# Allegro board CAD3.brd
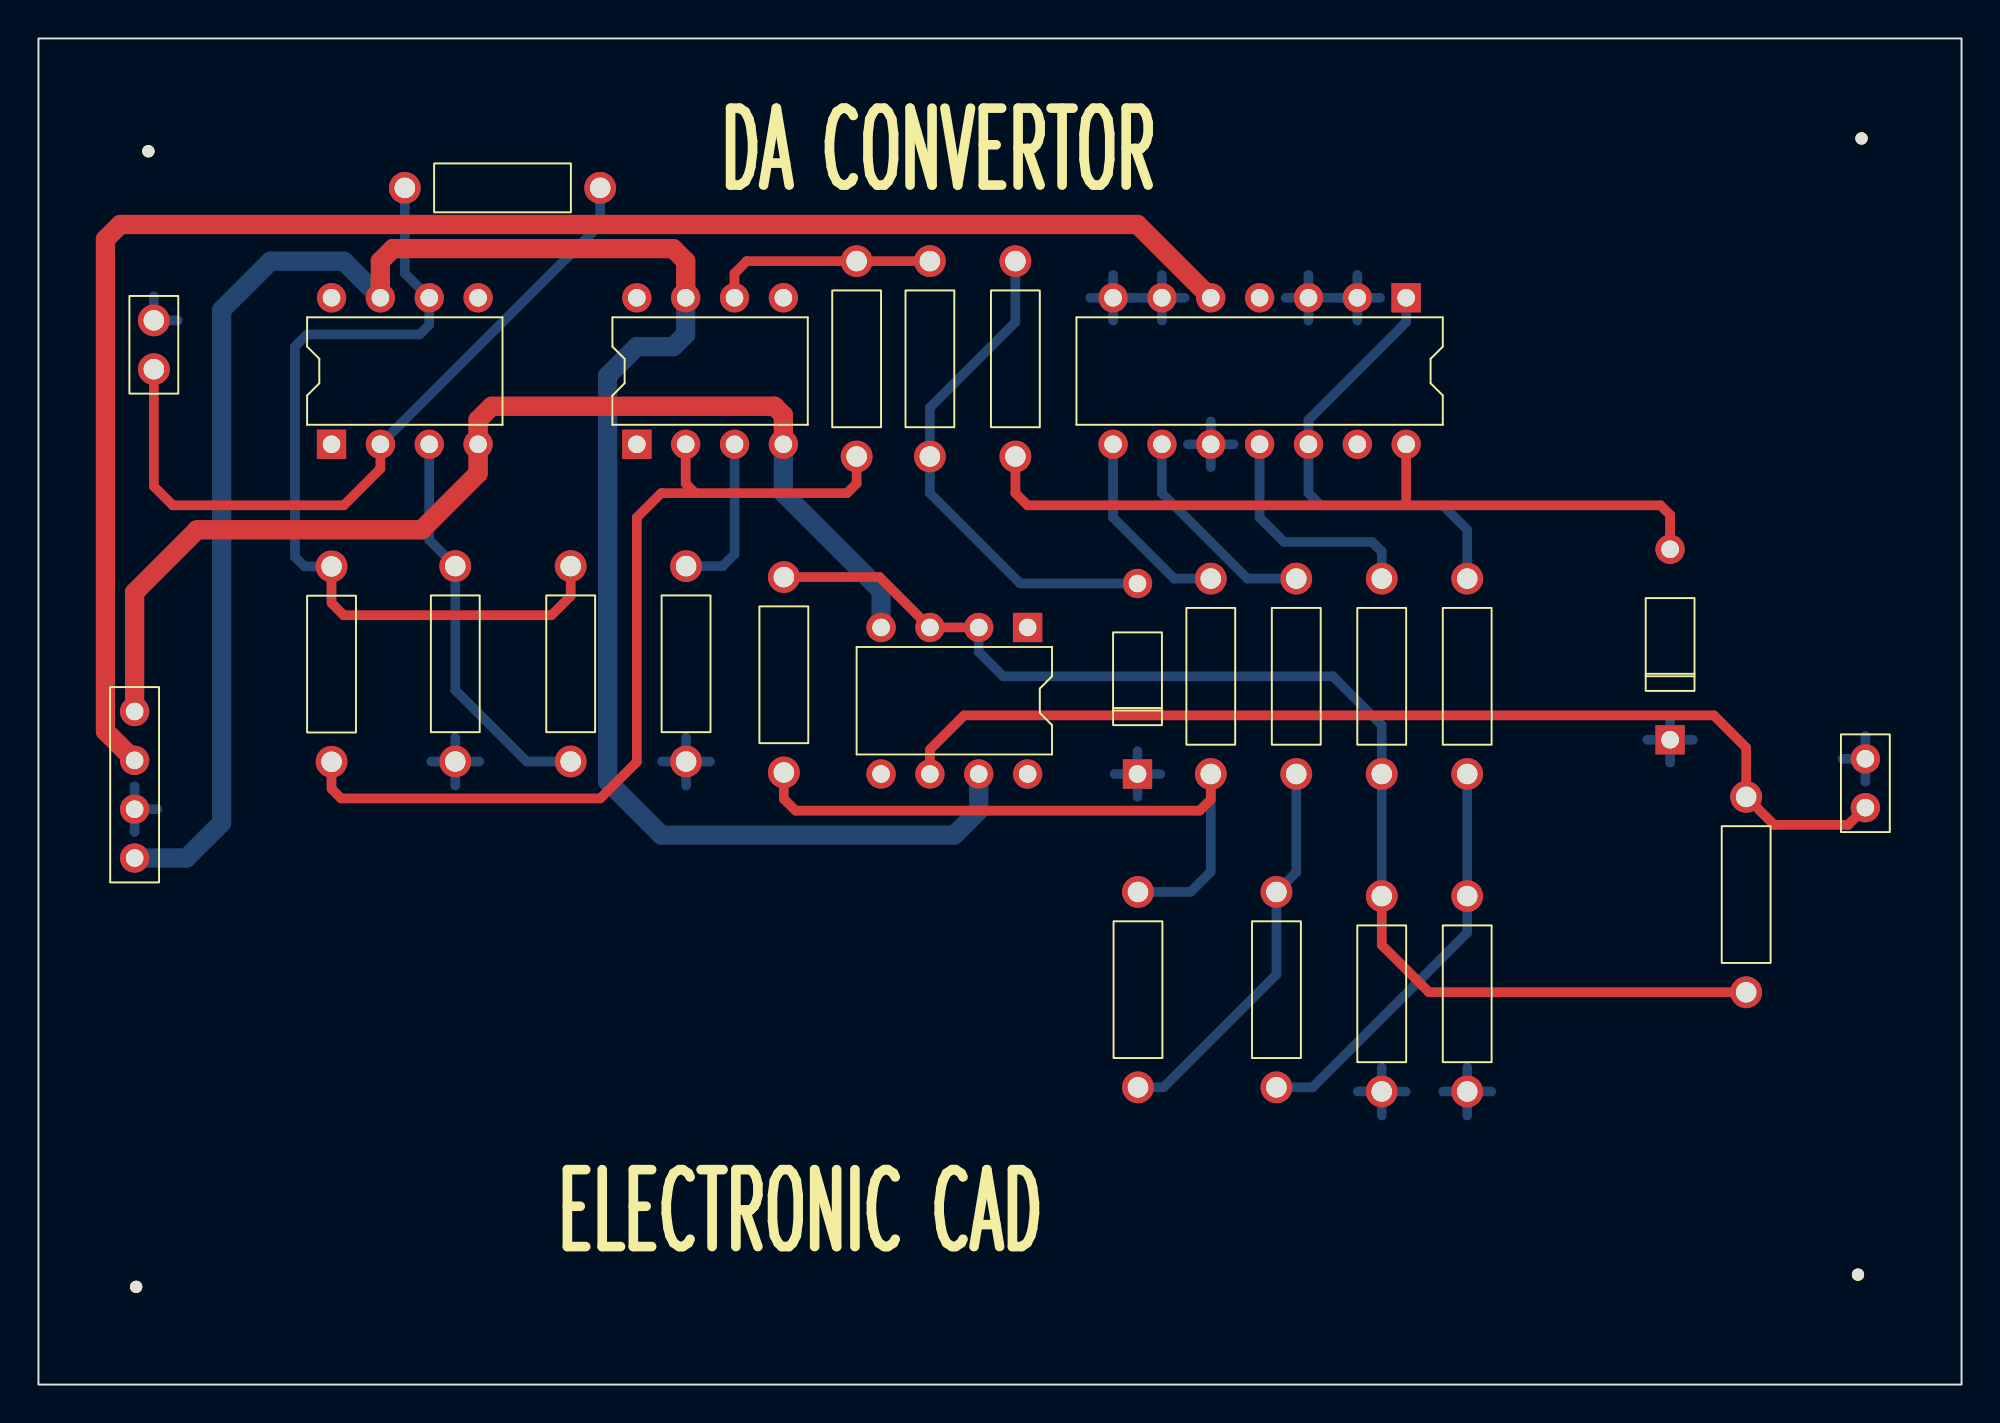
[diagram p0: board, top side]
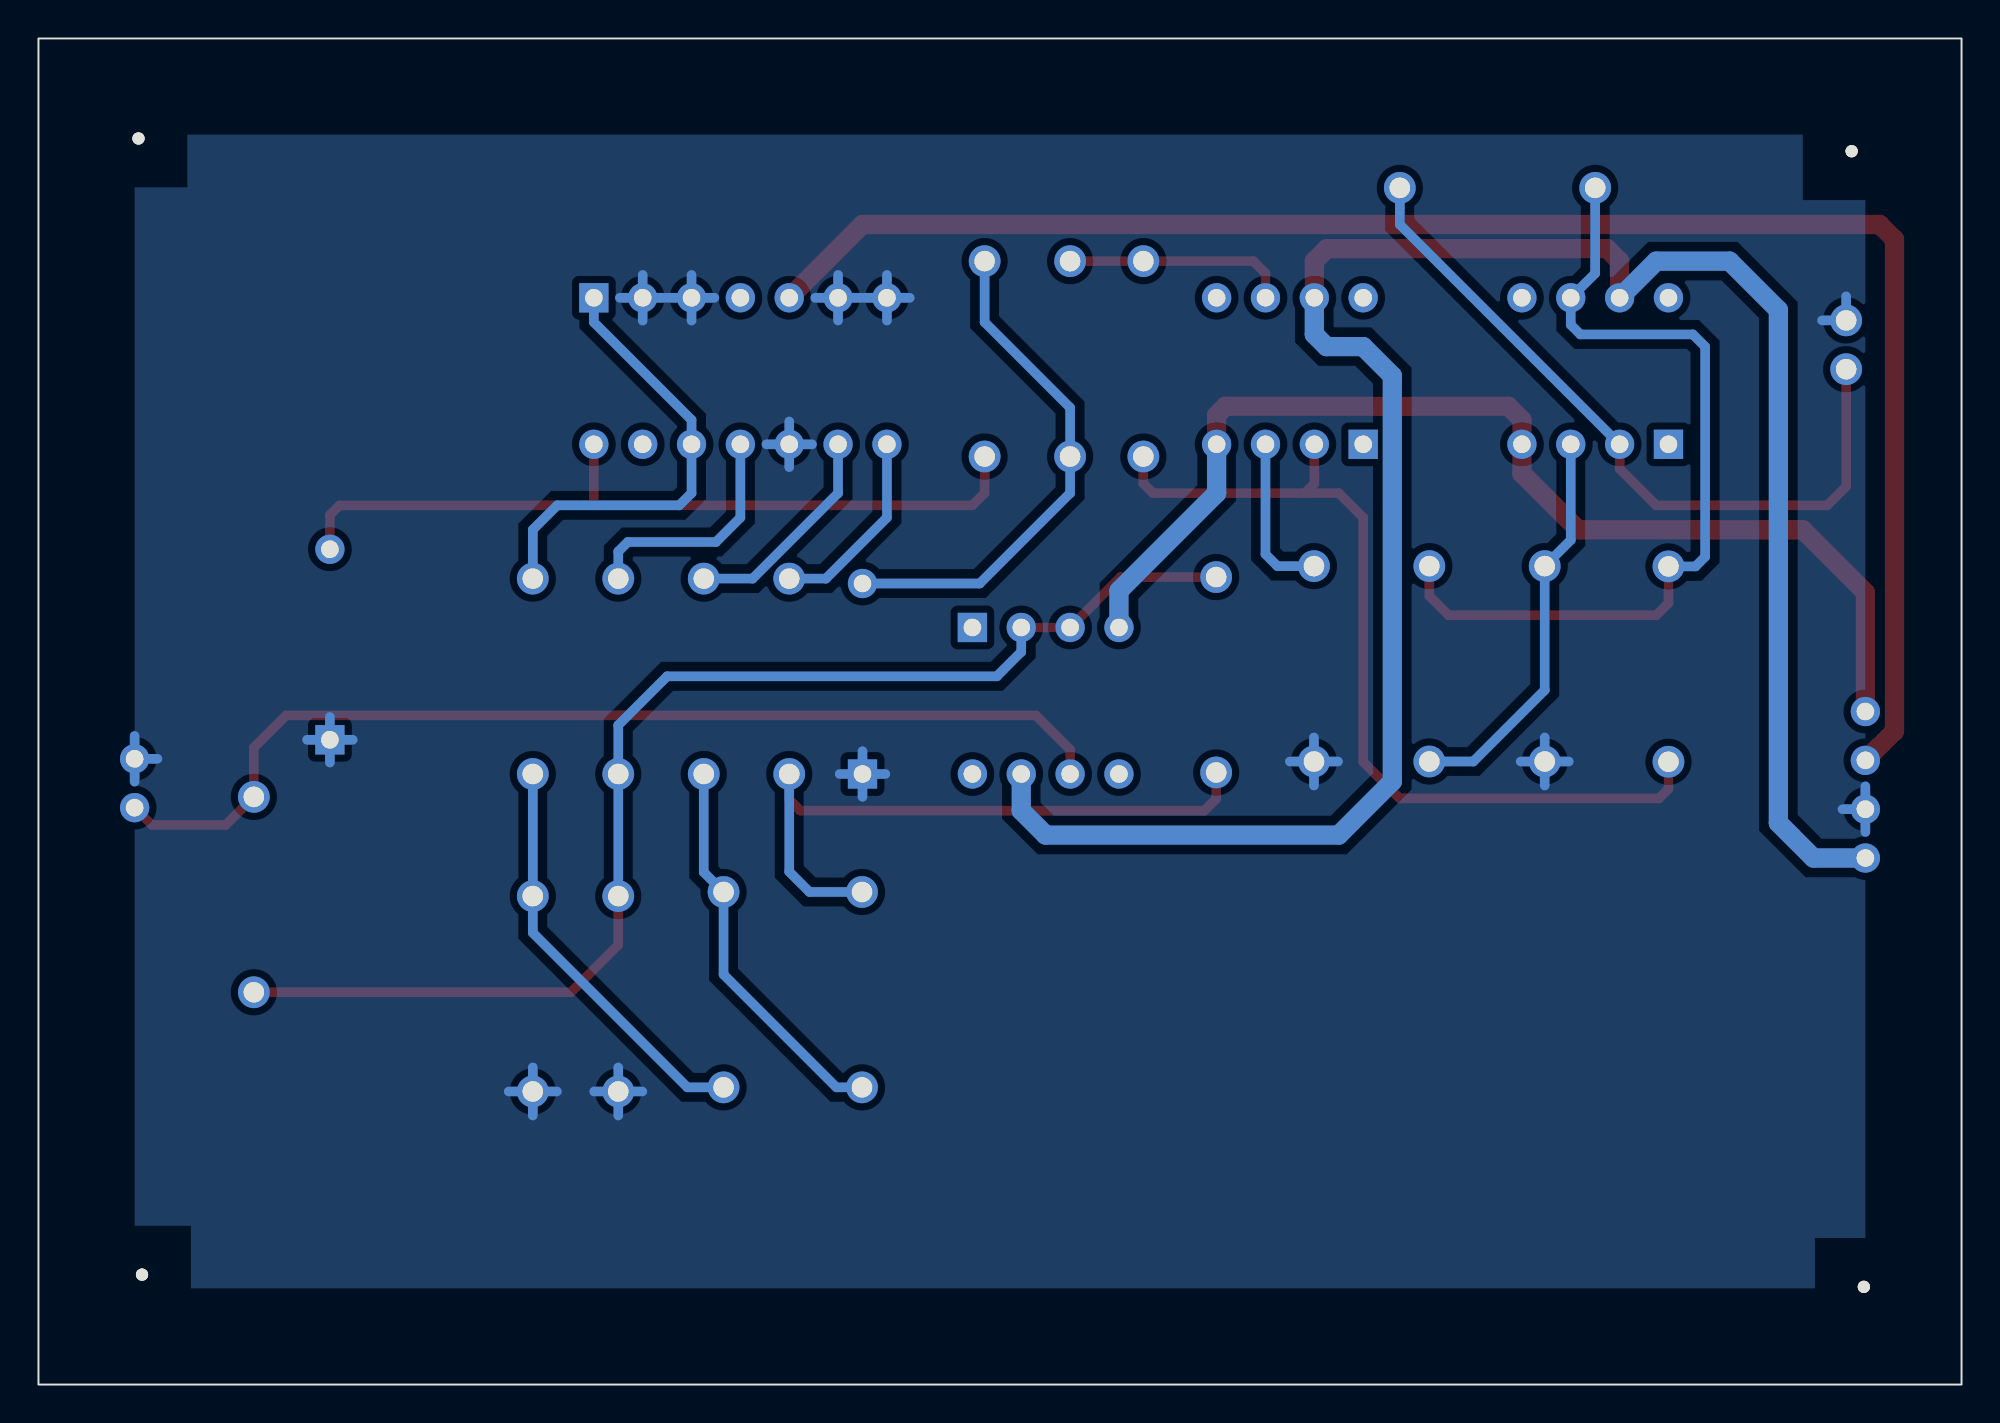
[diagram p1: board, bottom side, seen from below]

Outline 100 x 70 mm; copper layers: TOP, BOTTOM. Coordinates in mm from the lower left corner of the outline.
Outline path: rectangle 0,0 100,70

## Design rules (mm)
constraint set DEFAULT: min track width 0.5

## Placement (name value [footprint] x y rotation side)
C1  0.01uF  [CAPCK05]  6 52.8 0 top
D1  D1N4148  [DO41]  57.15 31.75 0 top
D2  RD100EB  [DO41]  84.84 33.53 0 top
J1  CON2  [JUMPER2]  95 30 90 top
J2  CON4  [JUMPER4]  5 35 270 top
NOREF  -  [unnamed]  5.08 5.08 0 top
NOREF#2  -  [#2]  0 70 0 top
NOREF#3  -  [unnamed]  94.8 64.8 0 top
NOREF#4  -  [unnamed]  5.71 64.14 0 top
NOREF#5  -  [unnamed]  94.61 5.71 0 top
NOREF#6  -  [#2]  100 0 90 top
R1  10K  [RES400]  29.21 62.23 90 top
R2  5.1K  [RES400]  42.55 48.26 0 top
R3  10K  [RES400]  15.24 42.55 180 top
R4  1K  [RES400]  46.35 58.42 180 top
R5  1K  [RES400]  50.8 58.42 180 top
R6  10K  [RES400]  33.67 32.4 0 top
R7  6.8K  [RES400]  27.68 32.4 0 top
R8  1K  [RES400]  21.68 32.4 0 top
R9  22K  [RES400]  69.85 41.91 180 top
R10  22K  [RES400]  88.8 20.4 0 top
R11  10K  [RES400]  38.76 31.83 0 top
R12  22K  [RES400]  60.96 31.75 0 top
R13  10K  [RES400]  57.17 15.46 0 top
R14  22K  [RES400]  65.41 31.75 0 top
R15  10K  [RES400]  64.38 15.46 0 top
R16  10KK  [RES400]  69.85 25.4 180 top
R17  22K  [RES400]  74.3 31.75 0 top
R18  10K  [RES400]  74.3 15.24 0 top
U1  LM741  [DIP8_3]  15.24 48.9 90 top
U2  LM741  [DIP8_3]  31.11 48.9 90 top
U3  74LS90  [DIP14_3]  71.12 56.52 270 top
U4  LM741  [DIP8_3]  51.44 39.37 270 top

## Library data of the parts
C1 = CAP NP: Tolerance: ***; User Part Number: ***
D1 = 1N4148
D2 = RD100EB
J1 = CON2: User Part Number: ***
J2 = CON4: User Part Number: ***
R1-R18 = R: Tolerance: ***; User Part Number: ***
U1 U2 U4 = LM741_1: Tolerance: ***; User Part Number: ***
U3 = 74LS90_6: Tolerance: ***; User Part Number: ***

## Footprints (pads in the part's own frame, mm; a bottom-side part is the same pattern mirrored in y, then rotated)
CAPCK05
  round 1.651 hole 1.067: 1(0,0) 2(0,2.54)
DIP8_3
  rect 1.524x1.524 hole 0.914: 1(0,0)
  round 1.524 hole 0.914: 2(0,-2.54) 3(0,-5.08) 4(0,-7.62) 5(7.62,-7.62) 6(7.62,-5.08) 7(7.62,-2.54) 8(7.62,0)
DIP14_3
  rect 1.524x1.524 hole 0.914: 1(0,0)
  round 1.524 hole 0.914: 2(0,-2.54) 3(0,-5.08) 4(0,-7.62) 5(0,-10.16) 6(0,-12.7) 7(0,-15.24) 8(7.62,-15.24) 9(7.62,-12.7) 10(7.62,-10.16) 11(7.62,-7.62) 12(7.62,-5.08) 13(7.62,-2.54) 14(7.62,0)
DO41
  rect 1.524x1.524 hole 0.914: 1(0,0)
  round 1.524 hole 0.914: 2(0,9.906)
JUMPER2
  round 1.524 hole 0.914: 1(0,0) 2(2.54,0)
JUMPER4
  round 1.524 hole 0.914: 1(0,0) 2(2.54,0) 3(5.08,0) 4(7.62,0)
RES400
  round 1.651 hole 1.067: 1(0,0) 2(0,10.16)
unnamed
  round 0.635 hole 3.175 unplated: (0,0)

## Nets
+5V: J2.2 U3.5
+12V: J2.1 U1.4(V-) U2.4(V-) U4.4(V-)
-12V: J2.4 U1.7 U2.7 U4.7
GND: C1.2 D1.1 D2.1 J1.2 J2.3 R6.1 R8.1 R16.2 R18.1 U3.2 U3.3 U3.6 U3.7(R92) U3.10
CLK: D2.2 R5.2 U3.14
OUT: J1.1 R10.2 U4.6
SIG: R9.2 R10.1 R11.2 R16.1 U4.2 U4.3
N00054: C1.1 R1.1 U1.2
N00264: R7.1 R8.2 U1.3
N00273: R1.2 R3.1 R7.2 U1.6
N00387: R2.1 R3.2 U2.2
N00396: R2.2 R4.1 U2.6
N00497: R6.2 U2.3
N00536: D1.2 R4.2 R5.1
N01393: R11.1 R12.1 R13.2
N01407: R13.1 R14.1 R15.2
N01420: R15.1 R17.1 R18.2
N01708: R9.1 U3.11
N01720: R12.2 U3.8
N01727: R14.2 U3.9
N01734: R17.2 U3.1 U3.12

Pads without a net: U1 1 5 8; U2 1 5 8; U3 4 13; U4 1 5 8

## Routing (per net, layer and track width the routed paths; a pad name or vN(x,y) marks a point on that pad's centre or on a via; arc(x,y) is an arc through that point)
+5V: length 87.1
  TOP w1: J2.2 3.48,33.98 3.48,59.55 4.25,60.33 57.15,60.33 U3.5
+12V: length 58.9
  TOP w1: J2.1 5,41.2 8.26,44.45 19.93,44.45 22.86,47.38 U1.4 22.86,50.16 23.57,50.87 38.27,50.87 38.73,50.41 U2.4
  BOTTOM w1: U4.4 43.81,41.27 38.73,46.35 U2.4
-12V: length 113.1
  TOP w1: U2.7 33.66,58.42 33,59.07 18.43,59.07 17.78,58.42 U1.7
  BOTTOM w1: J2.4 7.7,27.38 9.53,29.21 9.53,55.88 12.06,58.42 15.88,58.42 U1.7 ; U4.7 48.9,29.84 47.62,28.57 32.38,28.57 29.6,31.36 29.6,52.46 31.11,53.98 33.02,53.98 33.66,54.61 U2.7
GND: length 62.9
  BOTTOM w0.5: 69.85,13.99 R16.2 ; R16.2 68.6,15.24 ; R16.2 71.1,15.24 ; R16.2 69.85,16.49 ; J2.3 5,31.11 ; J2.3 5,28.73 ; J2.3 6.19,29.92 ; 57.23,56.52 U3.6 ; U3.6 58.42,57.7 ; U3.6 58.42,55.33 ; U3.6 59.61,56.52 ; 67.39,56.52 U3.2 ; U3.2 69.77,56.52 ; U3.2 68.58,57.7 ; U3.2 68.58,55.33 ; 55.88,55.33 U3.7 ; U3.7 54.69,56.52 ; U3.7 57.07,56.52 ; U3.7 55.88,57.7 ; 7.25,55.34 C1.2 6,56.59 ; 60.96,47.71 U3.10 ; U3.10 60.96,50.08 ; U3.10 62.15,48.9 ; U3.10 59.77,48.9 ; 20.42,32.4 R8.1 ; R8.1 21.68,31.15 ; R8.1 21.68,33.65 ; R8.1 22.93,32.4 ; 57.15,30.56 D1.1 ; D1.1 57.15,32.94 ; D1.1 55.96,31.75 ; D1.1 58.34,31.75 ; 64.85,56.52 U3.3 ; U3.3 67.23,56.52 ; U3.3 66.04,55.33 ; U3.3 66.04,57.7 ; 84.84,32.34 D2.1 ; D2.1 83.66,33.53 ; D2.1 84.84,34.72 ; D2.1 86.03,33.53 ; R6.1 33.67,33.65 ; R6.1 32.42,32.4 ; R6.1 33.67,31.15 ; R6.1 34.93,32.4 ; J1.2 95,33.73 ; J1.2 95,31.35 ; J1.2 93.81,32.54 ; 73.04,15.24 R18.1 ; R18.1 74.3,13.99 ; R18.1 74.3,16.49 ; R18.1 75.55,15.24
CLK: length 41.4
  TOP w0.5: 71.12,45.72 51.44,45.72 50.8,46.35 R5.2 ; 71.12,45.72 U3.14 ; 71.12,45.72 84.34,45.72 84.84,45.22 D2.2
OUT: length 54.9
  TOP w0.5: U4.6 46.35,33.02 48.13,34.8 87.12,34.8 88.8,33.12 R10.2 90.26,29.1 94.1,29.1 J1.1
SIG: length 66.4
  TOP w0.5: R16.1 69.85,22.86 72.31,20.4 R10.1 ; U4.2 U4.3 43.73,41.99 R11.2
  BOTTOM w0.5: R16.1 R9.2 69.85,34.29 67.31,36.83 50.16,36.83 48.9,38.1 U4.2
N00054: length 38.4
  TOP w0.5: C1.1 6,46.7 6.99,45.72 15.88,45.72 17.78,47.62 U1.2
  BOTTOM w0.5: U1.2 29.21,60.33 R1.1
N00264: length 20.9
  BOTTOM w0.5: R7.1 25.39,32.4 21.68,36.11 R8.2 20.32,43.91 U1.3
N00273: length 44.7
  TOP w0.5: R3.1 15.24,40.64 15.88,40.01 26.67,40.01 27.68,41.01 R7.2
  BOTTOM w0.5: R1.2 19.05,57.78 U1.6 20.32,55.11 19.82,54.61 13.97,54.61 13.34,53.98 13.34,43.05 13.84,42.55 R3.1
N00387: length 47.3
  TOP w0.5: R2.1 42.55,46.85 42.05,46.35 34.16,46.35 ; 34.16,46.35 32.38,46.35 31.11,45.09 31.11,32.38 29.21,30.48 15.74,30.48 15.24,30.98 15.24,32.38 ; 34.16,46.35 33.66,46.85 U2.2
N00396: length 11.7
  TOP w0.5: R4.1 R2.2 36.83,58.42 36.2,57.78 U2.6
N00497: length 8.5
  BOTTOM w0.5: U2.3 36.2,43.18 35.58,42.56 R6.2
N00536: length 26.6
  BOTTOM w0.5: R5.1 50.8,55.24 46.35,50.8 R4.2 46.35,46.35 51.05,41.66 D1.2
N01393: length 34.7
  TOP w0.5: R12.1 60.96,30.42 60.38,29.84 39.37,29.84 38.76,30.45 R11.1
  BOTTOM w0.5: R13.2 59.91,25.61 60.96,26.67 R12.1
N01407: length 20.5
  BOTTOM w0.5: R13.1 58.51,15.46 64.38,21.32 R15.2 65.41,26.64 R14.1
N01420: length 21.5
  BOTTOM w0.5: R17.1 R18.2 74.3,23.5 66.25,15.46 R15.1
N01708: length 12.3
  BOTTOM w0.5: R9.1 69.85,43.31 69.35,43.81 64.77,43.81 63.5,45.09 U3.11
N01720: length 10.2
  BOTTOM w0.5: U3.8 55.88,45.08 59.05,41.91 R12.2
N01727: length 11.4
  BOTTOM w0.5: U3.9 58.42,46.35 62.87,41.91 R14.2
N01734: length 23.8
  BOTTOM w0.5: R17.2 74.3,44.45 73.03,45.72 66.67,45.72 66.04,46.35 U3.12 66.04,50.16 71.12,55.24 U3.1

## Copper pours and planes (outline as drawn; the poured copper is in the pictures)
GND on BOTTOM: 5,5 5,65 95,65 95,5 ; 2 cut-outs

## Text on the board
Ref Des/Silkscreen Top: ELECTRONIC CAD | DA CONVERTOR
DIMENSION: FIGURE | FINISHED_SIZE | 0.914 | 1.067 | 3.175 | DRILL CHART: TOP to BOTTOM | ALL UNITS ARE IN MILLIMETERS | PLATED | NON-PLATED | QTY | 48 | 38 | 4
